# Altium PCB ESP32Designv1.1.PcbDoc (part 3 of 3)
Units mil, origin at the board's own origin, x right, y up, seen from the top; angles counter-clockwise.
Board outline 2700 x 1000 mil, 4 copper layers (L1, L2, L3, L4), stack 61.583 mil thick; 64 components, 73 nets, 299 pads, 159 vias.
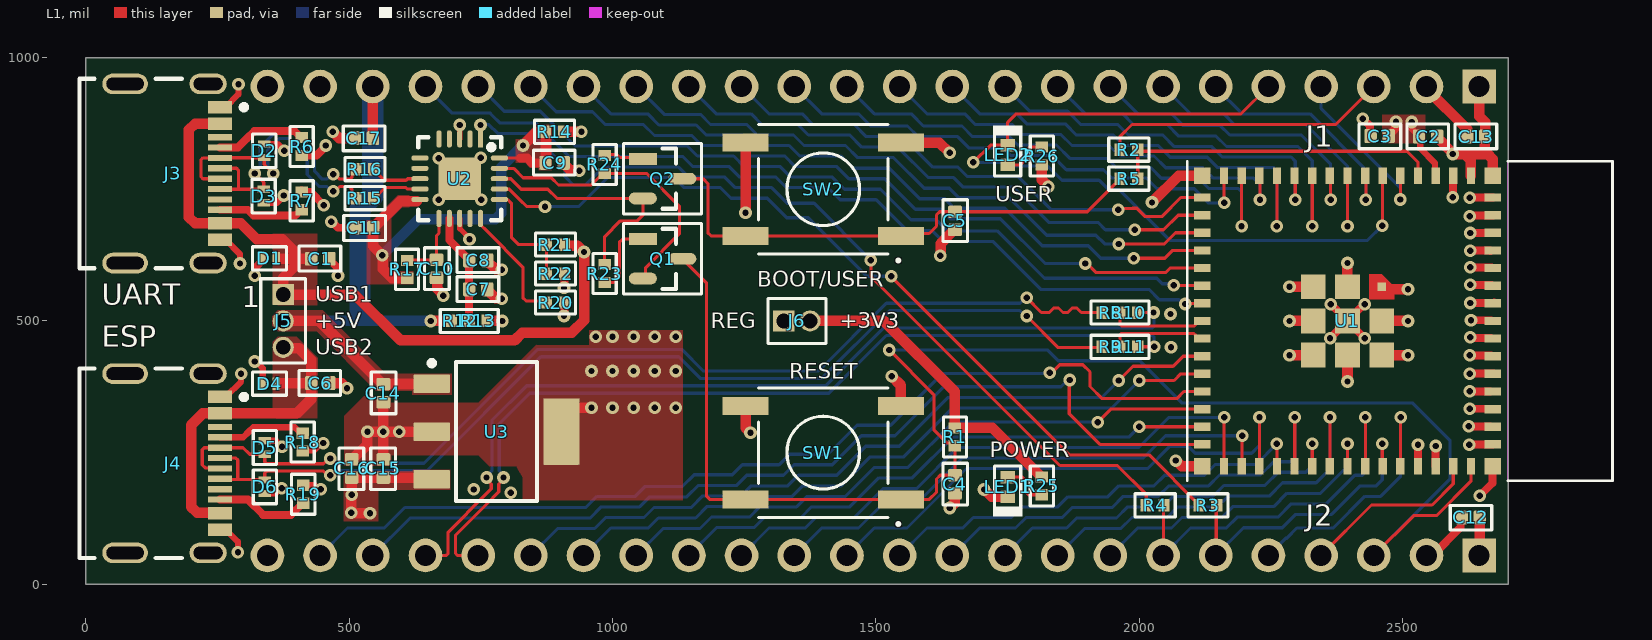
[diagram p0: L1 view]

## Via types
v1: diameter 24, hole 12, L1 to L4, tented both sides, 159 vias

## Nets (pads, with @x,y where several pads share a name; then routed paths per layer and width w, separated by ;. In a path a pad name is that pad's centre, name@x,y a point inside that pad or via, vN(x,y) a via of type N, cw(c..) or ccw(c..) an arc to the next point about the centre after c; other vN are vias at no path point) (continued)
GPIO17: J1.20 U1.21 | length 1531
  L1 w6: v1(2065,568) 2065.54,567.46 2118.9,567.46 U1.21
  L4 w6: J1.20 747.47,945 794.47,898 863,898 929,832 1142.15,832 1161.15,813 1229.86,813 1249.86,793 1318.58,793 1338.58,773 1417.29,773 1440.29,750 1508.58,750 1566.58,692 1614.4,692 1635.4,671 1730,671 1820,581 2033,581 2043.32,570.68 2062.32,570.68 v1(2065,568)
GPIO18: J1.21 U1.22 | length 1641.4
  L1 w6: v1(2087.24,532.24) 2087.85,532.85 2114.99,532.85 U1.22@2115.14,533
  L4 w6: J1.21 695,895 767,895 772,890 786,876 837,876 854,876 918,812 1133.86,812 1152.86,793 1221.58,793 1241.58,773 1310.29,773 1330.29,753 1409.01,753 1432.01,730 1500.29,730 1558.29,672 1606.11,672 1627.11,651 1721.72,651 1812.72,560 2018.36,560 2038.06,540.3 2075.39,540.3 2083.45,532.24 v1(2087.24,532.24)
GPIO21: J2.19 U1.25 | length 1431
  L1 w6: v1(1961,387) 1988,414 2064,414 2083.07,433.07 U1.25
  L4 w6: J2.19 896,106 966,106 987,127 1059.72,127 1078.72,146 1149.43,146 1171.43,168 1244.15,168 1263.15,187 1332.86,187 1352.86,207 1425.58,207 1480.65,262.07 1544.37,262.07 1637.29,355 1929,355 v1(1961,387)
GPIO26: J2.18 U1.26 | length 1317.2
  L1 w6: v1(2000,387) 2066,387 2078.61,399.61 U1.26
  L4 w6: J2.18 997,107 1068,107 1087,126 1157.72,126 1179.72,148 1252.43,148 1271.43,167 1341.15,167 1361.15,187 1433.86,187 1488.93,242.07 1552.65,242.07 1645.58,335 1948,335 v1(2000,387)
GPIO33: J2.17 U1.28 | length 1189.5
  L1 w6: v1(1921,308) 1945.68,332.68 U1.28
  L4 w6: J2.17 1096,106 1166,106 1188,128 1260.72,128 1279.72,147 1349.43,147 1369.43,167 1442.15,167 1497.22,222.07 1560.93,222.07 1646.86,308 v1(1921,308)
GPIO34: J2.16 U1.29 | length 1075.6
  L1 w6: v1(2000.03,298.97) 2000.28,299.21 U1.29
  L4 w6: J2.16 1198,108 1269,108 1288,127 1357.72,127 1377.72,147 1450.43,147 1505.5,202.07 1569.22,202.07 1647.15,280 1980.82,280 1999.78,298.97 v1(2000.03,298.97)
GPIO35: J2.15 U1.31 | length 1117.2
  L1 w6: U1.31 2160.89,224.52 2160.89,316.89 v1(2161,317)
  L4 w6: J2.15 1297,107 1366,107 1386,127 1458.72,127 1513.79,182.07 1577.5,182.07 1655.43,260 1999.25,260 2056.25,317 v1(2161,317)
GPIO36: J2.14 U1.32 | length 1001.4
  L1 w6: U1.32@2195,224.91 2194.62,225.29 2194.62,281.62 v1(2195,282)
  L4 w6: J2.14 1397,107 1467,107 1522.07,162.07 1585.79,162.07 1663.72,240 2007.53,240 2049.53,282 v1(2195,282)
GPIO37: J2.13 U1.33 | length 1028.9
  L1 w6: U1.33@2227.97,221.41 v1(2227.97,316.97)
  L4 w6: J2.13 1497,107 1559,107 1672,220 2015.82,220 2057.82,262 2093,262 2106,249 2213,249 2227.97,263.97 v1(2227.97,316.97)
GPIO38: J2.12 U1.34 | length 846.5
  L1 w6: v1(2261,267) 2261.09,266.91 2261.09,224.5 U1.34
  L4 w6: J2.12 1597,107 1665,107 1685,127 1756.72,127 1776.72,147 1845.43,147 1864.43,166 1940.15,166 1961.15,187 2027.86,187 2047.86,207 2123.15,207 2143.79,227.64 2221.64,227.64 v1(2261,267)
GPIO39: J2.11 U1.35 | length 899.3
  L1 w6: U1.35@2294.97,221.41 v1(2294.97,316.97)
  L4 w6: J2.11 1697,107 1765,107 1785,127 1853.72,127 1872.72,146 1948.43,146 1969.43,167 2036.15,167 2056.15,187 2131.43,187 2152.07,207.64 2229.93,207.64 2255.11,232.82 2288.06,232.82 2294.97,239.73 v1(2294.97,316.97)
GPIO40: J2.10 U1.36 | length 738.2
  L1 w6: v1(2328,267) 2328.05,266.95 2328.05,224.46 U1.36
  L4 w6: J2.10 1797,107 1862,107 1881,126 1956.72,126 1977.72,147 2044.43,147 2064.43,167 2139.72,167 2160.36,187.64 2238.21,187.64 2263.39,212.82 2316,212.82 2328,224.82 v1(2328,267)
GPIO41: J2.9 U1.37 | length 778.3
  L1 w6: U1.37@2361.97,221.41 v1(2361.97,316.97)
  L4 w6: J2.9 1896,106 1965,106 1986,127 2052.72,127 2072.72,147 2148,147 2168.64,167.64 2246.49,167.64 2271.67,192.82 2335.54,192.82 2361.97,219.25 v1(2361.97,316.97)
GPIO42: J2.8 U1.38 | length 605.6
  L1 w6: U1.38 v1(2395,267)
  L4 w6: J2.8 1997,107 2061,107 2081,127 2156.72,127 2177.36,147.64 2254.78,147.64 2279.96,172.82 2343.82,172.82 2395,224 v1(2395,267)
GPIO45: J2.5 U1.41 | length 520.6
  L1 w6: U1.41@2495.97,221.41 v1(2495.97,316.97)
  L4 w6: J2.5 2277.64,87.64 2279.63,87.64 2298.99,107 2368,107 2428,167 2457.94,167 2495.97,205.03 v1(2495.97,316.97)
GPIO46: J2.4 U1.44 | length 340.7
  L1 w6: J2.4 2440.6,150.6 2555.74,150.6 2595.82,190.68 U1.44
GPIO47: J2.23 U1.27 | length 1872.9
  L1 w6: v1(1830,402) 1833.79,402 1848.79,417 1892.82,417 1906.41,403.41 1906.41,375.59 1929.32,352.68 2071,352.68 2084.46,366.14 U1.27
  L4 w6: J2.23 497,107 567,107 606,146 949.43,146 970.43,167 1043.15,167 1062.15,186 1132.86,186 1154.86,208 1227.58,208 1246.58,227 1316.29,227 1336.29,247 1409.01,247 1464.08,302.07 1527.8,302.07 1625.73,400 1828,400 v1(1830,402)
GPIO48: J2.22 U1.30 | length 1802
  L1 w6: v1(1868,388) 1867,387 1867,323.82 1925.07,265.75 U1.30
  L4 w6: J2.22 616,126 957.72,126 978.72,147 1051.43,147 1070.43,166 1141.15,166 1163.15,188 1235.86,188 1254.86,207 1324.58,207 1344.58,227 1417.29,227 1472.37,282.07 1536.08,282.07 1629.01,375 1851.21,375 1864.21,388 v1(1868,388)
NetJ3_A5: J3.A5 R6.2 | length 172.8
  L1 w15: J3.A5 288.89,829.13 305,845.24 319.94,860.19 396.64,860.19 408.82,848.01 R6.2
NetJ3_B5: J3.B5 R7.2 | length 164.2
  L1 w15: J3.B5 305,711.02 307.73,711.02 318.94,699.81 397.64,699.81 408.82,710.99 R7.2
NetJ4_A5: J4.A5 R18.2 | length 171.9
  L1 w12: J4.A5 299.01,279.13 310,290.12 318.29,298.41 396.6,298.41 406.19,288.82 406.19,287.64 410.82,283.01 R18.2@412,283.01
NetJ4_B5: J4.B5 R19.2 | length 179
  L1 w15: J4.B5 307.94,161.02 336.96,132 389.83,132 411.82,153.99 R19.2
NetLED1_2: LED1.2 R25.1 | length 91.8
  L1 w6: LED1.2 1778.14,203.7 1784,197.84 1784,175.85 1789.86,169.99 R25.1
NetLED2_2: LED2.2 R26.1 | length 88.4
  L1 w6: LED2.2 1774.3,796.3 1786,808 1786,824.16 1791.86,830.02 R26.1
NetQ1_1: Q1.1 R23.2 | length 145.2
  L1 w6: R23.2 1002.14,572.99 1013,583.85 1013,649.54 1018.86,655.4 Q1.1
NetQ2_1: Q2.1 R24.2 | length 76.1
  L1 w6: R24.2@985,816.01 1007.99,816.01 1014,810 1054.98,810 Q2.1
NetR20_1: R20.1 U2.15 | length 232.8
  L1 w6: U2.15 749.37,682.63 762,670 830,602 830,543.86 835.86,538 871.99,538 R20.1
RTS_FTDI: Q1.2 R24.1 U2.19 | length 556.5
  L1 w6: U2.19 812.32,789.68 830.19,771.81 883.66,771.81 897.47,758 959.83,758 983.82,781.99 R24.1@985,781.99 ; R24.1 1065.01,779.99 1127,718 1127,665.17 1062.83,601 1062.83,585.85 Q1.2
RXD_FTDI: R4.2 U2.1 | length 1659
  L1 w6: v1(1490.41,615.52) 1490.41,584.41 1849.07,225.75 1958.25,225.75 2012.99,171.01 R4.2
  L1 w10.01: U2.1 v1(749.37,872)
  L4 w6: v1(749.37,872) 750,872.63 765.37,872.63 782,856 845.72,856 910,791.72 910,773.82 925.82,758 948.18,758 982.18,792 1125.58,792 1144.58,773 1213.29,773 1233.29,753 1302.01,753 1331.69,723.32 1382.61,723.32 v1(1490.41,615.52)
TXD_FTDI: R3.2 U2.17 | length 1623.1
  L1 w6: U2.17 785.64,750.09 804.1,750.09 825,729.18 836.73,717.45 871.55,717.45 v1(872,717) ; v1(1529.09,584.91) 1529.09,583.91 1867.25,245.75 2018.43,245.75 2112.99,151.18 R3.2
  L4 w6: v1(872,717) 935.47,717 990.47,772 1117.29,772 1136.29,753 1205.01,753 1225.01,733 1293.73,733 1330.73,696 1371.75,696 1482.84,584.91 v1(1529.09,584.91)
U0RXD: J2.6 R3.1 U1.40 | length 583.9
  L1 w6: J2.6 2146,56 2146,149 R3.1 ; U1.40@2461,222.91 v1(2461,267)
  L4 w6: J2.6 2197.64,107.64 2271.35,107.64 2296.53,132.82 2364.82,132.82 2419,187 2449.66,187 2461,198.34 v1(2461,267)
U0TXD: J2.7 R4.1 U1.39 | length 744.9
  L1 w6: J2.7 2046,56 2046,149 R4.1 ; U1.39@2428.97,221.41 v1(2428.97,316.97)
  L4 w6: J2.7 2097,107 2165,107 2185.64,127.64 2263.06,127.64 2288.24,152.82 2354.82,152.82 2409,207 2423.11,207 2428.97,212.86 v1(2428.97,316.97)
VBUS_SENSE: R21.1 R22.2 U2.16 | length 217.9
  L1 w6: U2.16 800.93,730.63 808,723.56 808,659 822,645 R21.1 R22.2
pads on no net: J1.24 J3.A8 J3.B8 J4.A8 J4.B8 U2.2 U2.4 U2.5 U2.6 U2.7 U2.14

## Polygon pours and split planes (outlines as drawn)
GND on L1 "GND_L01_P012" (solid, pour order 12): 579,357 579,345 745,345 855,455 856,454 956,454 956,482 1133,482 1133,160 830,160 829.96,203.62 822,216 816.85,224 766,224 745,245 580,245 580,224 491,224 491,320 528,357
+5V_VBUS2 on L1 "+5V_VBUS2_L01_P011" (solid, pour order 11): 355.02,460.07 360,465 364.94,469.94 400.68,470.06 440.21,430.52 440,315 355,315
+5V_VBUS1 on L1 "+5V_VBUS1_L01_P010" (solid, pour order 10): 355,530 440,530 440,666 355,666
+5V on L1 "+5V_L01_P009" (solid, pour order 9): 354,509 365,520 450,520 570,400 695,400 695,360 620,360 620,368 551,368 439,480 365,480 354,491
+3V3_REG on L1 "+3V3_REG_L01_P007" (solid, pour order 7): 490,120 490.84,120 555,120 555,180 692,180 692,218 621,218 621,215 619,215 490,215
3V3_FTDI on L1 "3V3_FTDI_L01_P002" (solid, pour order 2): 545.08,691.3 534,691.3 534,683.15 534,570 622,570 622,594 588,594 580,602 580,695 601,716 614.03,716 614.03,739 592.13,739
3V3_FTDI on L1 "3V3_FTDI_L01_P001" (solid, pour order 1): 816,800 834,800 843,791 860,791 860,786 885,786 885,872 854,872 827,845 816,845
+3V3 on L1 "+3V3_L01_P000" (solid, pour order 0): 2461,837 2543,837 2543,891 2461,891
GND on L2 "GND_L02_P015" (solid, pour order 15): 25,20 30,20 2680,20 2680,980 25,980
+3V3 on L2 "+3V3_L02_P013" (solid, pour order 13): 2680,20 2680,980 1340,980 1355,965 1355,475 1425,475 1425,725 2490,725 2490,20
+3V3_REG on L2 "+3V3_REG_L02_P014" (solid, pour order 14): 485,200 710,200 710,100 485,100
GND on L3 (split plane): 2679.9,20.1 20.1,20.1 20.1,979.9 2679.9,979.9

## Silkscreen, mask and mechanical layers (free items; w line width, h text height)
Top Overlay:
  text "J1" at 2316,831 h40
  text "USER" at 1726,726 h30
  text "USB1" at 436,536 h30
  text "UART" at 31,531 h40
  text "+5V" at 436,486 h30
  text "REG" at 1186,486 h30
  text "+3V3" at 1431,486 h30
  text "ESP" at 31,451 h40
  text "USB2" at 436,436 h30
  text "POWER" at 1716,241 h30
  text "J2" at 2316,111 h40
Bottom Overlay:
  text "NC" at 368,868 h40 r90
  text "GND" at 468,868 h40 r90
  text "+5V" at 568,868 h40 r90
  text "IO18" at 668,868 h40 r90
  text "IO17" at 768,868 h40 r90
  text "IO16" at 868,868 h40 r90
  text "IO15" at 968,868 h40 r90
  text "IO14" at 1068,868 h40 r90
  text "IO13" at 1168,868 h40 r90
  text "IO12" at 1268,868 h40 r90
  text "IO11" at 1368,868 h40 r90
  text "IO10" at 1468,868 h40 r90
  text "IO9" at 1568,868 h40 r90
  text "IO8" at 1668,868 h40 r90
  text "IO7" at 1768,868 h40 r90
  text "IO6" at 1868,868 h40 r90
  text "IO5" at 1968,868 h40 r90
  text "IO4" at 2068,868 h40 r90
  text "IO3" at 2168,868 h40 r90
  text "IO2" at 2268,868 h40 r90
  text "IO1" at 2368,868 h40 r90
  text "IO0" at 2468,868 h40 r90
  text "+3V3" at 2568,868 h40 r90
  text "GND" at 2668,868 h40 r90
  text "<---PIN1--->" at 2668,718 h35 r90
  text "[C]2026" at 1451.63,615 h40
  text "ESP32 S3 WITH USB C" at 1695,540 h40
  text "Designed By:" at 1529.93,443.33 h40
  text "Harshak V P" at 1525,355 h40
  text "USB+" at 768,283 h40 r90
  text "+3V3" at 2668,283 h40 r90
  text "USB-" at 673,278 h40 r90
  text "IO47" at 468,273 h40 r90
  text "IO48" at 568,273 h40 r90
  text "IO26" at 968,273 h40 r90
  text "IO33" at 1068,273 h40 r90
  text "IO34" at 1168,273 h40 r90
  text "IO35" at 1268,273 h40 r90
  text "IO36" at 1368,273 h40 r90
  text "IO37" at 1468,273 h40 r90
  text "IO38" at 1568,273 h40 r90
  text "IO39" at 1668,273 h40 r90
  text "IO40" at 1763,273 h40 r90
  text "IO42" at 1968,273 h40 r90
  text "IO45" at 2263,273 h40 r90
  text "IO46" at 2363,273 h40 r90
  text "IO21" at 868,263 h40 r90
  text "IO41" at 1863,263 h40 r90
  text "GND" at 2563,243 h40 r90
  text "GND" at 368,238 h40 r90
  text "TXD" at 2068,238 h40 r90
  text "RXD" at 2168,238 h40 r90
  text "EN" at 2463,203 h40 r90
Top Solder:
  region: 1136 vertices and 0 holes, not listed, extent 1013.65,206.5 1124.96,387.5
Board Shape:
  the board outline again, w20

## Text inside footprints (layer, text, board x,y; h text height)
J1: Bottom Overlay "1" at 2631,1036 h40 r270
J2: Bottom Overlay "1" at 2621,-29 h40 r270
J5: Top Overlay "1" at 296,526 h40
SW1: Top Overlay "RESET" at 1335,390 h30; Top Overlay "•" at 1555,140 h50 r180; Top 3D Body "*" at 1515.5,192.06 h50 r180
SW2: Top Overlay "•" at 1555,640 h50 r180; Top Overlay "BOOT/USER" at 1275,565 h30; Top 3D Body "*" at 1515.5,692.06 h50 r180